# EAGLE board perfusion_esquematico (EAGLE 9.6.0)
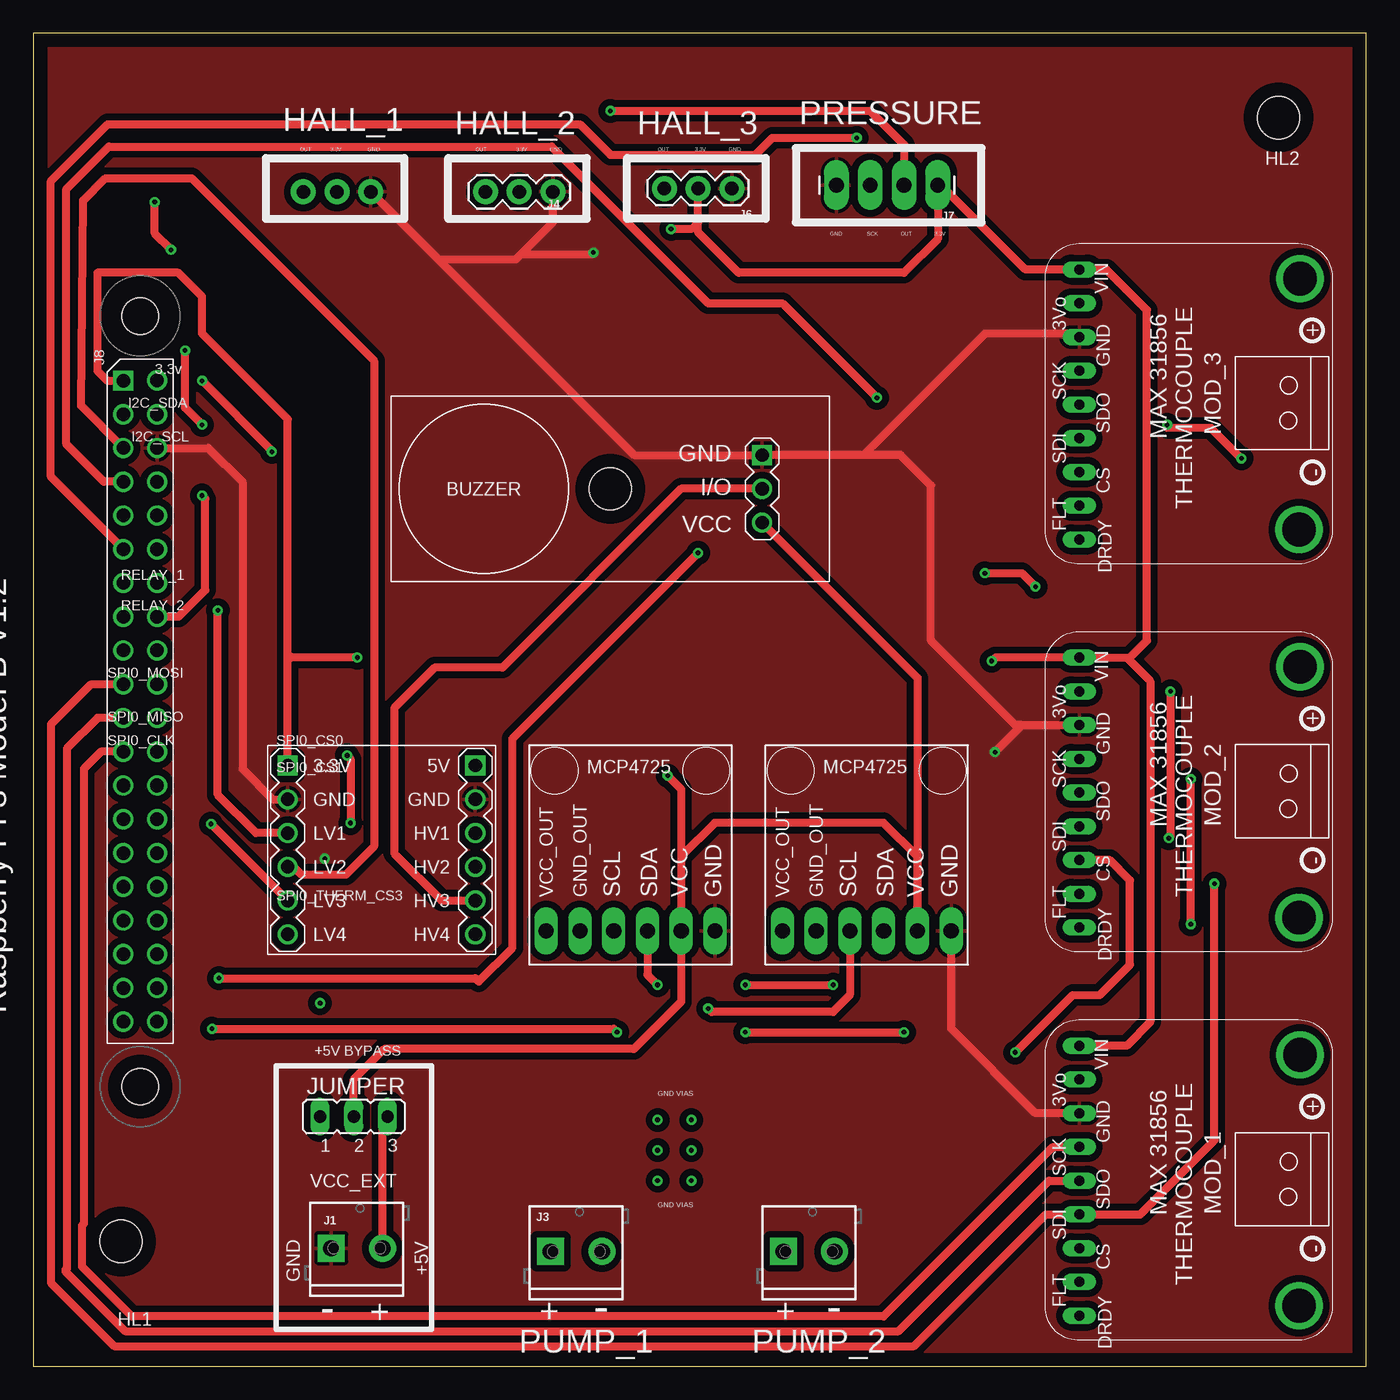
[diagram p0: board, top side]
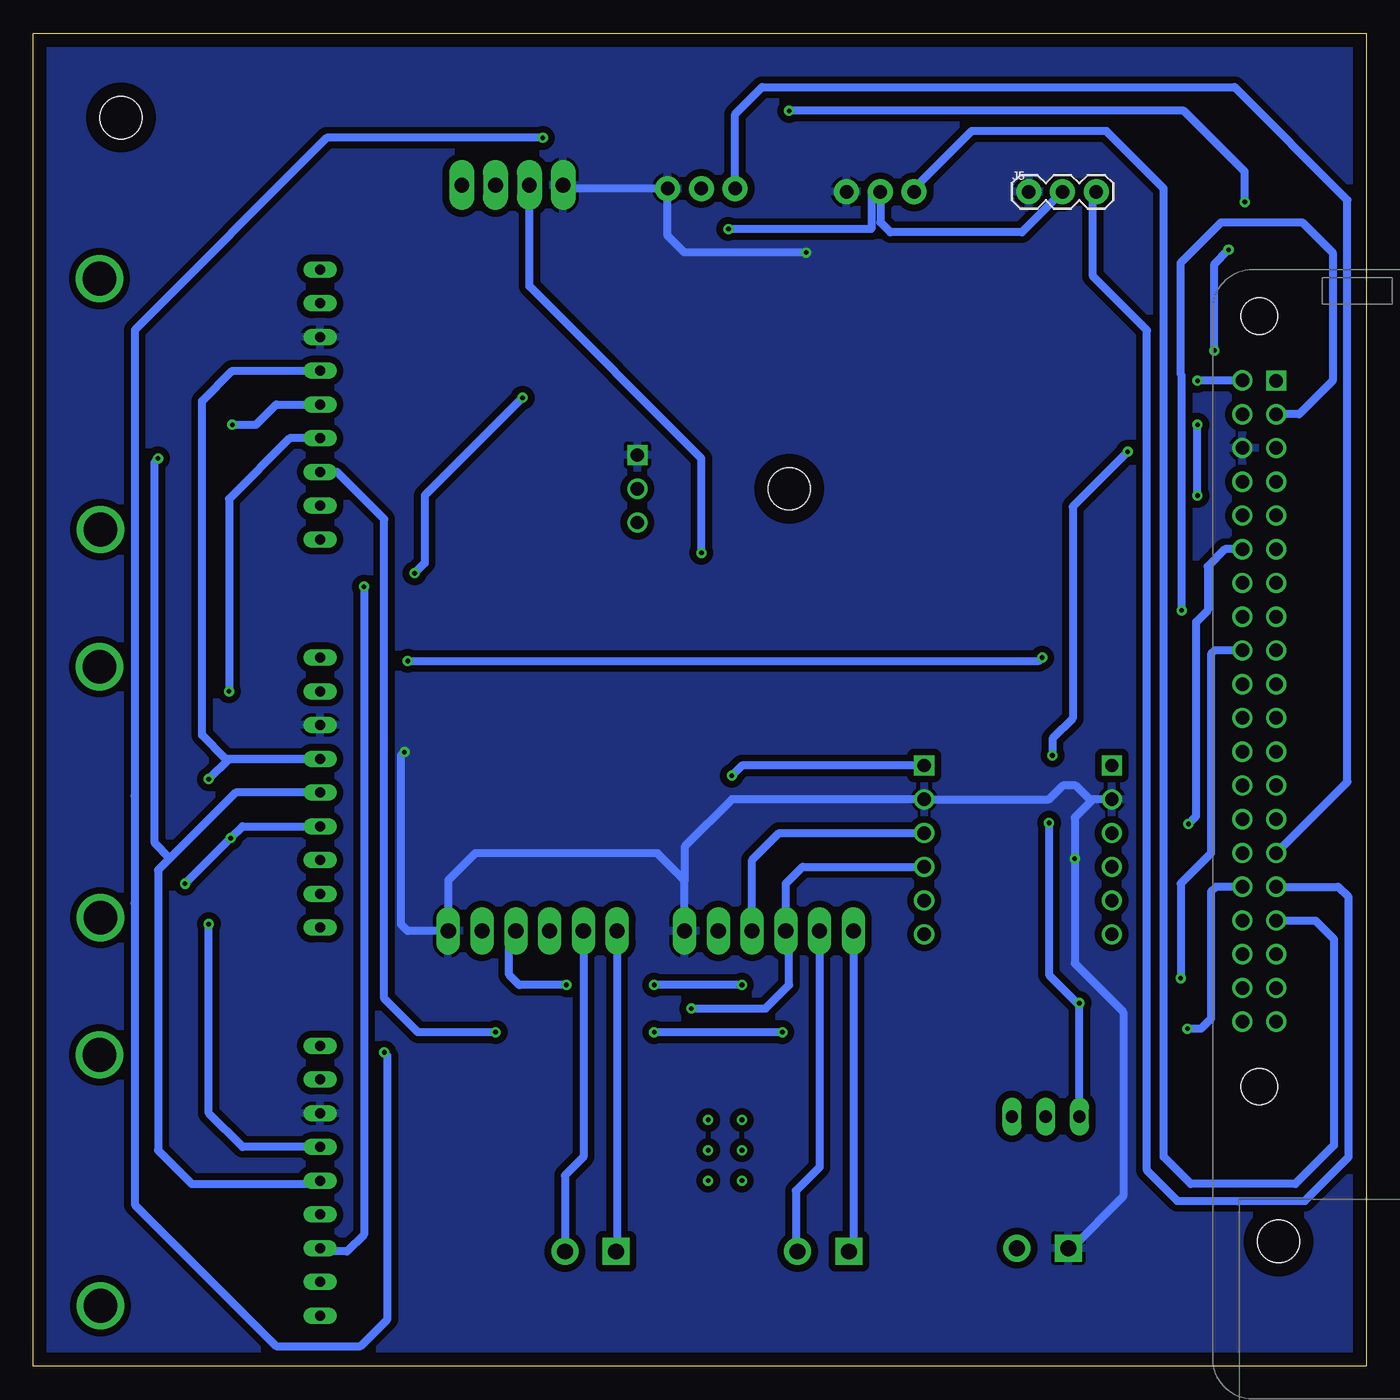
[diagram p1: board, bottom side, seen from below]

Size 100.33 x 100.33 mm. Coordinates in mm from the lower left corner, seen from the top.
Outline: 0,0 100.33,0 100.33,100.33 0,100.33 0,0
Copper layers (1*16): Top 0.035mm / dielectric 1.5mm / Bottom 0.035mm
Design rules "default *": minimum track width 16mil, minimum drill 0.35mm, track to track 18mil, track to pad 6mil, pad to pad 6mil, via to via 6mil, smd to smd 6mil, copper to edge 40mil, drill to drill 6mil, minimum pad ring 10mil, minimum via ring 8mil, stop-mask expansion 4mil, vias tented up to drill 0mil, thermal gap 10mil
Net classes: 0 default: width 0.61 mm, clearance 0.508 mm
Holes 3.2 mm at 93.73,93.98 6.6,9.4

## Footprints (pad centres in the part's own frame; a part is rotated, then mirrored left to right if it is on the bottom)
SCREWTERMINAL-3.5MM-2_LOCK = drill 1.2 pad 2.032 square: 1 -0.178,0 | drill 1.2 pad 2.032: 2 3.678,0
1X03 = drill 1.016 pad 1.88: 1 0,0; 2 2.54,0; 3 5.08,0
1X04_LONGPADS = drill 1.118 pad 1.88 long: 1 0,0; 2 2.54,0; 3 5.08,0; 4 7.62,0
JP2 = drill 0.914 long: 1 -2.54,0; 2 0,0; 3 2.54,0
RPI3 = drill 1.016 square: P$1 8.37,51.23 | drill 1.016: P$2 8.357,53.772; P$3 10.897,51.232; P$4 10.897,53.772; P$5 13.437,51.232; P$6 13.437,53.772; P$7 15.977,51.232; P$8 15.977,53.772; P$9 18.517,51.232; P$10 18.517,53.772; P$11 21.057,51.232; P$12 21.057,53.772; P$13 23.597,51.232; P$14 23.597,53.772; P$15 26.137,51.232; P$16 26.137,53.772; P$17 28.677,51.232; P$18 28.677,53.772; P$19 31.217,51.232; P$20 31.217,53.772; P$21 33.757,51.232; P$22 33.757,53.772; P$23 36.297,51.232; P$24 36.297,53.772; P$25 38.837,51.232; P$26 38.837,53.772; P$27 41.377,51.232; P$28 41.377,53.772; P$29 43.917,51.232; P$30 43.917,53.772; P$31 46.457,51.232; P$32 46.457,53.772; P$33 48.997,51.232; P$34 48.997,53.772; P$35 51.537,51.232; P$36 51.537,53.772; P$37 54.077,51.232; P$38 54.077,53.772; P$39 56.617,51.232; P$40 56.617,53.772 | hole 2.75: 3.5,52.5; 61.5,52.5
SOUND-BUZZER = drill 1 square: 1 -11.43,-2.54 | drill 1: 2 -11.43,0; 3 -11.43,2.54 | hole 3.2: 0,0
LEVEL-SHIFTER-4CH = drill 1 square: J1.1 -9.042,6.35; J2.1 5.08,6.35 | drill 1: J1.2 -9.042,3.81; J1.3 -9.042,1.27; J1.4 -9.042,-1.27; J1.5 -9.042,-3.81; J1.6 -9.042,-6.35; J2.2 5.08,3.81; J2.3 5.08,1.27; J2.4 5.08,-1.27; J2.5 5.08,-3.81; J2.6 5.08,-6.35
MAX31856 = drill 0.75 long: PINES1 2.54,2.54; PINES2 5.08,2.54; PINES3 7.62,2.54; PINES4 10.16,2.54; PINES5 12.7,2.54; PINES6 15.24,2.54; PINES7 17.78,2.54; PINES8 20.32,2.54; PINES9 22.86,2.54 | drill 2.54 pad 3.556: PINES10 3.232,19.135; PINES11 22.116,19.077
LIB1 = drill 1.143 pad 1.778 long: GND 1.27,1.27; GND2 1.27,11.43; OUT 1.27,13.97; SCL 1.27,8.89; SDA 1.27,6.35; VCC 1.27,3.81

## Placement (x,y rotation side)
J1  [SCREWTERMINAL-3.5MM-2_LOCK]  22.61,8.89 0 top
J2  [SCREWTERMINAL-3.5MM-2_LOCK]  56.64,8.64 0 top
J3  [SCREWTERMINAL-3.5MM-2_LOCK]  39.12,8.64 0 top
J4  [1X03]  39.12,88.39 180 top
J5  [1X03]  25.4,88.39 0 bottom
J6  [1X03]  52.58,88.65 180 top
J7  [1X04_LONGPADS]  68.07,88.9 180 top
JUMPER  [JP2]  24.13,18.8 0 top
PCB1  RPI3  [RPI3]  -44.45,82.55 270 top
U$2  SOUND-BUZZER  [SOUND-BUZZER]  43.43,66.04 180 top
U$3  LEVEL-SHIFTER-4CH  [LEVEL-SHIFTER-4CH]  28.19,38.86 0 top
U$4  MAX31856  [MAX31856]  76.2,55.88 270 top
U$5  MAX31856  [MAX31856]  76.2,26.67 270 top
U$6  MAX31856  [MAX31856]  76.2,85.09 270 top
U$7  LIB1MCP4725_ABF  [LIB1]  52.58,31.5 90 top
U$8  LIB1MCP4725_ABF  [LIB1]  70.36,31.5 90 top

## Library data of the parts
J1-J3 = SparkFun-Connectors; PROD_ID: CONN-08399
J4-J6 = SparkFun-Connectors
J7 = SparkFun-Connectors; PROD_ID: CONN-09696
JUMPER = jumper
PCB1 = e14_Rpi3_RevA
U$2 U$3 = diy-modules
U$4-U$6 = max31856_libreria
U$7 U$8 = mcp4725_alberto

## Nets
BUZZER_IN: PCB1.P$12 U$3.J1.5
BUZZER_OUT_5V: U$2.2 U$3.J2.5
DOUT_BAR: J7.2 PCB1.P$16
HALL1: J4.3 PCB1.P$33
HALL2: J5.3 PCB1.P$31
HALL3: J6.3 PCB1.P$29
I2C_SCL: PCB1.P$5 U$3.J1.4
I2C_SCL_5V: U$3.J2.4 U$7.SCL U$8.SCL
I2C_SDA: PCB1.P$3 U$3.J1.3
I2C_SDA_5V: U$3.J2.3 U$7.SDA U$8.SDA
MCP_1_GND: J2.2 U$8.GND2
MCP_1_VSS: J2.1 U$8.OUT
MCP_2_GND: J3.2 U$7.GND2
MCP_2_VSS: J3.1 U$7.OUT
RPI3_+3V: J4.2 J5.2 J6.2 J7.1 PCB1.P$1 U$3.J1.1 U$4.PINES1 U$5.PINES1 U$6.PINES1
RPI3_+5V: JUMPER.2 U$2.3 U$3.J2.1 U$7.VCC U$8.VCC
RPI3_+5V_IN: JUMPER.1 PCB1.P$2
RPI3_GND: J1.1 J4.1 J5.1 J6.1 J7.4 PCB1.P$6 U$2.1 U$3.J1.2 U$3.J2.2 U$4.PINES3 U$5.PINES3 U$6.PINES3 U$7.GND U$8.GND
SCK_BAR: J7.3 PCB1.P$18
SPI0_CLK: PCB1.P$23 U$4.PINES4 U$5.PINES4 U$6.PINES4
SPI0_CS0: PCB1.P$11 U$4.PINES7
SPI0_CS1: PCB1.P$7 U$5.PINES7
SPI0_MISO: PCB1.P$21 U$4.PINES5 U$5.PINES5 U$6.PINES5
SPI0_MOSI: PCB1.P$19 U$4.PINES6 U$5.PINES6 U$6.PINES6
SUPPLY_+5V: J1.2 JUMPER.3
THERMO_CS3: PCB1.P$32 U$6.PINES7

## Tracks (layer width: path | path; a pad name or v marks a point on that pad's centre or on a via)
BUZZER_IN  (via drill 0.35)
  Top 0.61: U$3.J1.5 v13.39,40.82
  Bottom 0.61: v13.39,40.82 12.8,41.4 12.8,56.03 11.94,56.9 11.94,60.2 10.64,61.49 PCB1.P$12
BUZZER_OUT_5V
  Top 0.61: U$2.2 48.77,66.04 35.31,52.58 30.23,52.58 27.18,49.53 27.18,38.61 30.73,35.05 U$3.J2.5
DOUT_BAR  (via drill 0.35)
  Top 0.61: PCB1.P$16 10.95,56.41 12.95,58.42 12.95,65.28 v12.7,65.53 | v12.7,70.87 11.43,72.14 v11.43,76.45 | v10.37,84.03 9.14,85.25 v9.14,87.63 | v43.43,94.49 62.99,94.49 65.53,91.95 J7.2
  Bottom 0.61: v12.7,65.53 v12.7,70.87 | v11.43,76.45 11.43,82.96 v10.37,84.03 | v9.14,87.63 9.14,89.92 13.72,94.49 v43.43,94.49
HALL1
  Bottom 0.61: PCB1.P$33 3.83,33.55 2.44,32.16 2.44,16.61 5.33,13.72 13.21,13.72 15.24,15.75 15.24,88.65 19.56,92.96 29.72,92.96 34.04,88.65 J4.3
HALL2
  Bottom 0.61: PCB1.P$31 2.11,36.09 1.32,35.31 1.32,15.75 4.62,12.45 14.22,12.45 16.51,14.73 16.51,77.98 20.57,82.04 20.57,88.14 J5.3
HALL3
  Bottom 0.61: PCB1.P$29 1.42,43.99 1.42,87.78 9.91,96.27 45.47,96.27 47.5,94.23 J6.3
I2C_SCL
  Top 0.61: U$3.J1.4 19.6,37.59 20.18,37.01 23.55,37.01 25.65,39.12 25.65,75.69 11.94,89.41 5.44,89.41 3.76,87.73 3.61,72.29 PCB1.P$5
I2C_SCL_5V  (via drill 0.35)
  Top 0.61: U$8.SCL 61.47,27.94 60.2,26.67 51.05,26.67 v50.8,26.92
  Bottom 0.61: v50.8,26.92 45.21,26.92 43.43,28.7 43.43,32.51 U$7.SCL 43.69,36.32 42.42,37.59 U$3.J2.4
I2C_SDA  (via drill 0.35)
  Top 0.61: U$3.J1.3 16.76,40.13 13.89,43.01 v13.89,56.9
  Bottom 0.61: PCB1.P$3 5.05,71.65 2.54,74.17 2.54,83.82 4.83,86.11 10.92,86.11 13.97,83.06 13.97,74.68 13.89,74.6 v13.89,56.9
I2C_SDA_5V  (via drill 0.35)
  Top 0.61: U$7.SDA 46.23,29.46 v46.99,28.7 | v53.59,28.7 v60.2,28.7
  Bottom 0.61: v46.99,28.7 v53.59,28.7 | v60.2,28.7 63.75,28.7 64.52,29.46 64.52,32.26 U$8.SDA | U$7.SDA 46.23,38.1 44.2,40.13 U$3.J2.3
MCP_1_GND
  Bottom 0.61: U$8.GND2 58.93,15.75 60.32,14.36 J2.2
MCP_1_VSS
  Bottom 0.61: U$8.OUT 56.39,8.71 J2.1
MCP_2_GND
  Bottom 0.61: U$7.GND2 41.15,14.99 42.93,13.21 42.93,8.77 J3.2
MCP_2_VSS
  Bottom 0.61: U$7.OUT 38.61,8.97 J3.1
N$1  (via drill 0.35)
  other vias: 49.53,16.26
N$2  (via drill 0.35)
  other vias: 49.53,18.54
N$3  (via drill 0.35)
  other vias: 49.53,13.97
N$4  (via drill 0.35)
  other vias: 46.99,18.54
N$5  (via drill 0.35)
  other vias: 46.99,16.26
N$6  (via drill 0.35)
  other vias: 46.99,13.97
RPI3_+3V  (via drill 0.35)
  Top 0.61: U$4.PINES1 82.55,53.34 83.82,54.61 83.82,79.5 80.77,82.55 U$6.PINES1 74.68,82.55 68.33,88.9 J7.1 68.07,84.84 65.53,82.3 53.09,82.3 50.04,85.34 50.04,86.11 | U$4.PINES1 82.3,53.34 84.07,51.56 84.07,25.91 82.3,24.13 U$5.PINES1 | U$3.J1.1 19.15,53.59 | 19.15,53.59 19.15,71.27 12.7,77.72 12.7,80.52 10.92,82.3 4.83,82.3 4.83,74.93 5.58,74.18 PCB1.P$1 | U$4.PINES1 72.39,53.34 v72.14,53.09 | v24.38,53.34 19.41,53.34 19.15,53.59 | 50.04,86.11 J6.2 | 50.04,86.11 49.53,85.6 v48.01,85.6
  Bottom 0.61: v72.14,53.09 24.64,53.09 v24.38,53.34 | J5.2 25.91,85.34 35.81,85.34 36.58,86.11 J4.2 37.26,88.39 37.26,85.6 v48.01,85.6
RPI3_+5V  (via drill 0.35)
  Top 0.61: U$2.3 66.55,51.82 U$8.VCC 66.55,38.35 64.01,40.89 51.31,40.89 48.77,38.35 | 48.77,38.35 U$7.VCC 48.77,27.43 45.21,23.88 26.42,23.88 24.13,21.59 JUMPER.2 | v47.75,44.45 48.77,43.43 48.77,38.35
  Bottom 0.61: U$3.J2.1 46.99,45.21 v47.75,44.45
RPI3_+5V_IN  (via drill 0.35)
  Top 0.61: v12.7,74.17 17.96,68.91 v17.96,68.83 | v23.62,45.97 23.88,45.72 v23.88,40.89
  Bottom 0.61: JUMPER.1 21.59,27.18 | 21.59,27.18 v21.59,27.33 | PCB1.P$2 12.68,74.19 v12.7,74.17 | v17.96,68.83 22.1,64.7 22.1,48.77 23.62,47.24 v23.62,45.97 | v23.88,40.89 23.88,29.46 21.59,27.18
RPI3_GND  (via drill 0.35)
  Top 0.61: U$5.PINES3 75.44,19.05 69.09,25.4 U$8.GND | U$6.PINES3 78.49,77.72 71.63,77.72 62.48,68.58 | 62.48,68.58 U$2.1 45.21,68.58 J5.1 30.48,83.31 36.32,83.31 36.7,83.69 | 74.42,48.26 73.91,48.26 67.56,54.61 67.56,66.29 65.28,68.58 62.48,68.58 | PCB1.P$6 13.18,69.11 15.75,66.55 15.75,44.96 18.03,42.67 U$3.J1.2 | v72.39,46.23 74.42,48.26 | 74.42,48.26 U$4.PINES3 | 36.7,83.69 39.12,86.11 J4.1 | 36.7,83.69 42.04,83.69 v42.16,83.82
  Bottom 0.61: U$7.GND 51.31,36.58 | 51.31,36.58 53.34,38.61 67.06,38.61 69.09,36.58 U$8.GND 72.14,32.77 72.64,33.27 72.64,45.97 v72.39,46.23 | 51.31,36.58 51.31,39.12 47.75,42.67 U$3.J2.2 23.88,42.67 22.84,43.71 21.86,43.71 20.82,42.67 20.57,42.67 | U$3.J1.2 20.57,42.67 | 20.57,42.67 21.95,41.3 v21.95,38.2 21.95,30.33 18.29,26.67 18.29,12.78 22.17,8.89 J1.1 | v42.16,83.82 51.31,83.82 52.58,85.09 J6.1 60.2,88.65 J7.4
  pour Bottom (isolate 0.254): 100.33,0 100.33,1.27 100.33,100.08 0.25,100.58 0.76,0 0.76,0.25
  pour Top: 1.27,0.51 99.82,0.51 99.82,99.31 0.76,99.31 0.76,0.51
SCK_BAR  (via drill 0.35)
  Top 0.61: v13.97,29.21 33.27,29.21 33.53,28.96 36.07,31.5 36.07,47.24 v50.04,61.21
  Bottom 0.61: PCB1.P$18 11.4,53.87 11.68,53.59 11.68,38.61 13.97,36.32 v13.97,29.21 | v50.04,61.21 50.04,68.33 62.99,81.28 J7.3
SPI0_CLK  (via drill 0.35)
  Top 0.61: v87.12,33.27 v87.12,44.2 | PCB1.P$23 5.11,46.25 3.81,44.96 3.81,10.73 3.68,10.61 3.68,7.49 7.42,3.76 64.01,3.76 76.76,16.51 U$5.PINES4
  Bottom 0.61: U$5.PINES4 84.58,16.51 87.12,19.05 v87.12,33.27 | v87.12,44.2 85.6,45.72 U$4.PINES4 85.85,45.72 87.63,47.5 87.63,72.64 85.34,74.93 U$6.PINES4
SPI0_CS0  (via drill 0.35)
  Top 0.61: PCB1.P$11 1.32,66.95 1.32,89.2 5.59,93.47 41.15,93.47 43.43,91.19 54.36,91.19 55.63,92.46 v61.98,92.46 | v73.91,23.62 78.23,27.94 80.26,27.94 82.55,30.23 82.55,36.58 81.03,38.1 U$4.PINES7
  Bottom 0.61: v61.98,92.46 78.23,92.46 92.69,78 92.69,42.95 92.71,42.93 92.71,34.86 92.69,34.84 92.69,12.17 82.04,1.52 75.69,1.52 73.66,3.56 73.66,23.37 v73.91,23.62
SPI0_CS1  (via drill 0.35)
  Top 0.61: PCB1.P$7 5.31,66.57 2.49,69.39 2.49,88.6 5.68,91.8 39.01,91.8 50.8,80.01 56.39,80.01 v63.5,72.9 | v71.63,59.69 74.42,59.69 v75.44,58.67
  Bottom 0.61: v63.5,72.9 70.87,65.53 70.87,60.45 v71.63,59.69 | v75.44,58.67 75.44,9.91 76.71,8.64 78.49,8.64 U$5.PINES7
SPI0_MISO  (via drill 0.35)
  Top 0.61: v90.93,68.33 88.65,70.61 85.34,70.61 v85.34,70.87 | PCB1.P$21 4.85,48.79 2.54,46.48 2.54,7.37 2.44,7.26 2.44,7.11 6.91,2.64 65.13,2.64 76.45,13.97 U$5.PINES5
  Bottom 0.61: 90.04,38.23 85.09,43.18 U$4.PINES5 | 90.04,38.23 90.93,37.34 90.93,16.26 88.39,13.72 78.99,13.72 U$5.PINES5 | 90.04,38.23 91.19,39.37 91.19,68.07 v90.93,68.33 | v85.34,70.87 83.57,70.87 82.04,72.39 U$6.PINES5
SPI0_MOSI  (via drill 0.35)
  Top 0.61: v88.9,36.32 88.9,17.02 83.31,11.43 U$5.PINES6 76.2,11.43 66.29,1.52 6.1,1.52 1.32,6.3 1.32,48.31 4.32,51.31 6.76,51.31 PCB1.P$19 | v85.6,50.8 85.6,39.88 v85.47,39.75
  Bottom 0.61: v88.9,36.32 v85.47,39.75 84.58,40.64 U$4.PINES6 | U$6.PINES6 81.03,69.85 85.6,65.28 v85.6,50.8
SUPPLY_+5V
  Top 0.61: J1.2 26.28,18.41 JUMPER.3
THERMO_CS3  (via drill 0.35)
  Top 0.61: v43.94,25.15 43.69,25.4 v13.46,25.4 | v53.59,25.15 v65.53,25.15
  Bottom 0.61: PCB1.P$32 11.3,36.09 11.68,35.71 11.68,26.16 12.45,25.4 v13.46,25.4 | v43.94,25.15 v53.59,25.15 | v65.53,25.15 71.37,25.15 73.91,27.69 73.91,63.75 77.47,67.31 U$6.PINES7

## Text on the board
tPlace: HALL_1 | HALL_2 | HALL_3 | PRESSURE | OUT | 3.3V | GND | OUT | 3.3V | GND | OUT | 3.3V | GND | HL2 | GND | SCK | OUT | 3.3V | 3.3v | I2C_SDA | I2C_SCL | MOD_3 | RELAY_1 | RELAY_2 | SPI0_MOSI | SPI0_MISO | SPI0_CLK | SPI0_CS0 | SPI0_CS1 | MOD_2 | SPI0_THERM_CS3 | +5V BYPASS | GND VIAS | VCC_EXT | GND VIAS | MOD_1 | +5V | GND | + | HL1 | - | + | - | + | - | PUMP_1 | PUMP_2